# Altium PCB lw-skit.PcbDoc
Units mm, origin at the board's own origin, x right, y up, seen from the top; angles counter-clockwise.
Board outline 70.02 x 90.04 mm, 2 copper layers (Top Layer, Bottom Layer); 8 components, 21 nets, 94 pads, 19 vias.
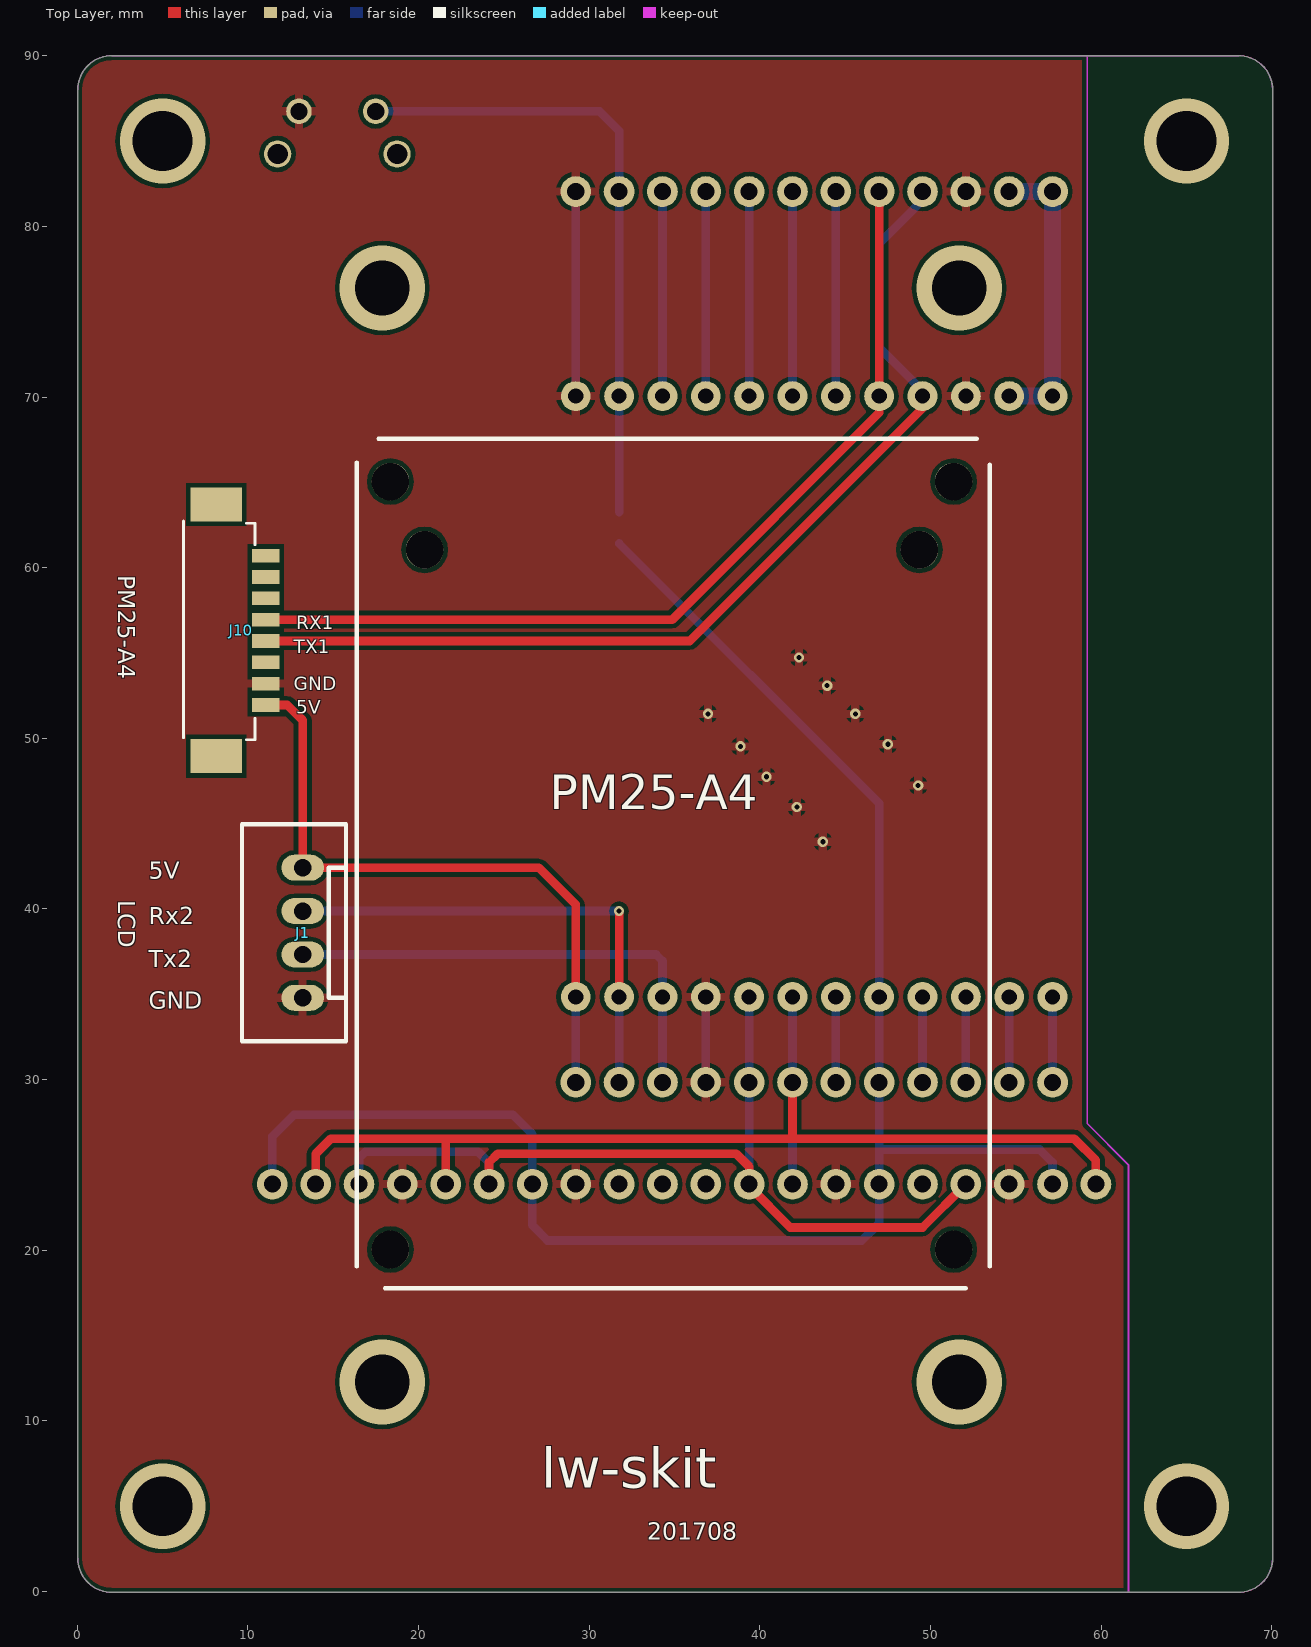
[diagram p0: Top Layer view]
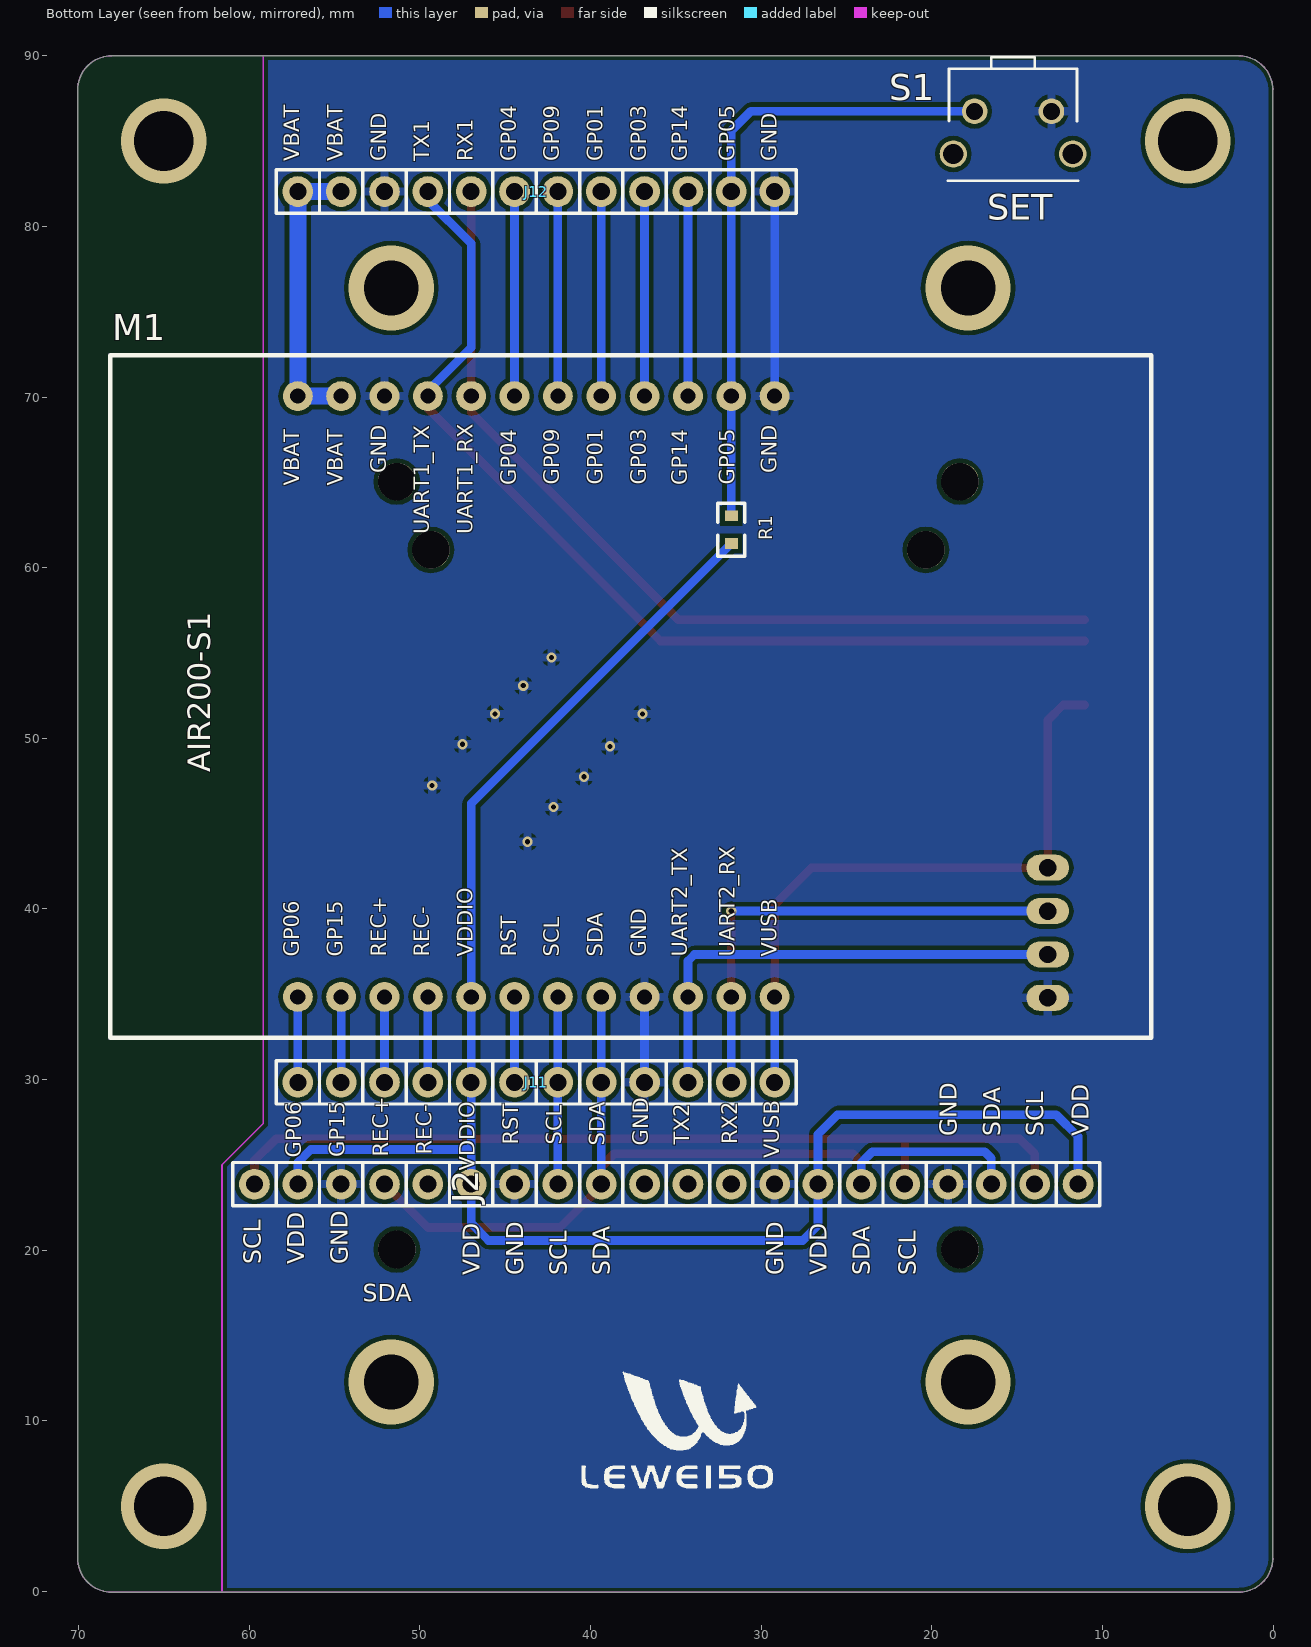
[diagram p1: Bottom Layer view, seen from below]

## Layer stack, top to bottom
Top Solder: solder mask 0.0102, Solder Resist, Dk 3.5
Top Layer: signal copper 0.0356
Dielectric 1: dielectric 0.32, FR-4, Dk 4.8
Bottom Layer: signal copper 0.0356
Bottom Solder: solder mask 0.0102, Solder Resist, Dk 3.5

## Board outline
0.027,1.961 0.027,88 cw(c2.027,88) 2.027,90 68.047,90 cw(c68.047,88) 70.047,88 70.047,1.961 cw(c68.047,1.961) 68.047,-0.039 2.027,-0.039 cw(c2.027,1.961)

## Design rules (kind name [scope] priority, off if disabled: settings)
Clearance 5VIN [InNet('+5V_IN')] p1: gap=0.508
Clearance RS485-B2 [InNet('RS485-B')] p2: gap=0.508
Clearance RS485-A2 [InNet('RS485-A')] p3: gap=0.508
Clearance VCC [InNet('+5V') vs InNet('GND')] p4: gap=0.508
Clearance Clear24V [InNet('POW') vs InNet('GND')] p5: gap=0.508
Clearance [All] p6: gap=0.254
HoleSize [All] p1: absolutevalues=TRUE maxlimit=5 minlimit=0.025 maxpercent=80.000 minpercent=20.000
MinimumSolderMaskSliver [All] p1: minsoldermaskwidth=0.2
PolygonConnect [All] p1: connectstyle=Relief reliefconductorwidth=0.508 reliefentries=4 polygonreliefangle="90 Angle" airgapwidth=0.254
RoutingVias [All] p1: holewidth=0.711 width=1.27 viastyle="Through Hole" minholewidth=0.711 minwidth=1.27 maxholewidth=0.711 maxwidth=1.27
SilkToSilkClearance [All] p1: silktosilkclearance=0.17
SilkToSolderMaskClearance [IsPad] p1: minsilkscreentomaskgap=0 clearancetoexposedcopper=TRUE
SolderMaskExpansion [All] p1: expansion=0.102
UnpouredPolygon [All] p1: allowunpoured=FALSE
Width Net1_1 [InNet('NetL1_1')] p1: maxlimit=3 minlimit=0.254 preferedwidth=0.508
Width 5V [InNet('5V')] p2: maxlimit=1.5 minlimit=0.5 preferedwidth=1
Width RXD [InNet('RXD')] p3: maxlimit=1.1 minlimit=0.254 preferedwidth=0.508
Width TXD [InNet('TXD')] p4: maxlimit=1.1 minlimit=0.254 preferedwidth=0.508
Width C-TXD [InNet('C-TXD')] p5: maxlimit=1.1 minlimit=0.254 preferedwidth=0.508
Width C-RXD [InNet('C-RXD')] p6: maxlimit=1.1 minlimit=0.254 preferedwidth=0.508
Width RS485-B [InNet('RS485-B')] p7: maxlimit=1.1 minlimit=0.5 preferedwidth=0.508
Width RS485-A [InNet('RS485-A')] p8: maxlimit=1.1 minlimit=0.5 preferedwidth=0.508
Width RS485-D [InNet('RS485-D')] p9: maxlimit=1.1 minlimit=0.5 preferedwidth=0.508
Width 3.3V [InNet('3.3V')] p10: maxlimit=2 minlimit=0.254 preferedwidth=0.5
Width RAW [InNet('RAW')] p11: maxlimit=3 minlimit=0.508 preferedwidth=1
Width 24V [InNet('24V')] p12: maxlimit=3 minlimit=1 preferedwidth=1
Width GND [InNet('GND')] p13: maxlimit=3 minlimit=0.254 preferedwidth=0.508
Width [All] p14: maxlimit=3 minlimit=0.254 preferedwidth=0.254
25 further rules are at their usual default settings.

## Components (designator, comment, footprint, x,y, rotation, side; value= is the part's Value field where it differs from the comment)
J1 "HMI" XH2.54_4P 13.208,38.608 r90 top
J2 "SIP20" DB-1X20 21.59,23.876 r0 bottom
J10 "PM2.5-A4" 1.27*8 11.049,60.706 r270 top
J11 "SIP12" DB-1X12 44.45,29.845 r180 bottom
J12 "SIP12" DB-1X12 44.45,82.042 r180 bottom
M1 "AIR200_S1" AIR200-S1 57.15,52.451 r90 bottom
R1 "10K" RES-SMD-0603 31.75,62.23 r270 bottom
S1 "SET" upkey 15.24,86.741 r180 bottom

## Footprints (in the part's own frame and the unit in brackets; to place one, negate y for a bottom-side part, rotate by r counter-clockwise, add the part's x,y. Pads: shape width x height; smd on the part's side, far side on the other; paste and mask are expansions set on the pad)
1.27*8 [mm]
  rect 0.8x1.6 smd: 1(8.75,0) 2(7.5,0) 3(6.25,0) 4(5,0) 5(3.75,0) 6(2.5,0) 7(1.25,0) 8(0,0)
  rect 2x3 smd: ""(-3,-2.9) ""(11.75,-2.9)
  silkscreen extent -2.03,-4.83 10.79,-0.63
AIR200-S1 [mil]
  round 69 hole 35: 1(-692.91,0) 2(-692.91,-100) 3(-692.91,-200) 4(-692.91,-300) 5(-692.91,-400) 6(-692.91,-500) 7(-692.91,-600) 8(-692.91,-700) 9(-692.91,-800) 10(-692.91,-900) 11(-692.91,-1000) 12(-692.91,-1100) 13(692.91,-1100) 14(692.91,-1000) 15(692.91,-900) 16(692.91,-800) 17(692.91,-700) 18(692.91,-600) 19(692.91,-500) 20(692.91,-400) 21(692.91,-300) 22(692.91,-200) 23(692.91,-100) 24(692.91,0)
  silkscreen extent -787,-1969 787,433
DB-1X12 [mm]
  round 1.8 hole 1: 1(-12.7,0) 2(-10.16,0) 3(-7.62,0) 4(-5.08,0) 5(-2.54,0) 6(0,0) 7(2.54,0) 8(5.08,0) 9(7.62,0) 10(10.16,0) 11(12.7,0) 12(15.24,0)
  silkscreen extent -13.97,-1.27 16.51,1.27, body extent -13.97,-1.27 16.51,1.27, height 2.5
DB-1X20 [mm]
  round 1.8 hole 1: 1(-10.16,0) 2(-7.62,0) 3(-5.08,0) 4(-2.54,0) 5(0,0) 6(2.54,0) 7(5.08,0) 8(7.62,0) 9(10.16,0) 10(12.7,0) 11(15.24,0) 12(17.78,0) 13(20.32,0) 14(22.86,0) 15(25.4,0) 16(27.94,0) 17(30.48,0) 18(33.02,0) 19(35.56,0) 20(38.1,0)
  silkscreen extent -11.43,-1.27 39.37,1.27, body extent -11.43,-1.27 39.37,1.27, height 2.5
RES-SMD-0603 [mil]
  rect 25x30 smd: 1(-32,0) 2(32,0)
  silkscreen extent -61,-31 61,31, body extent -50,-20 52,19, height 21
upkey [mm]
  round 1.5 hole 1: 1(-2.25,0) 2(2.25,0)
  round 1.6 hole 1.2: ""(-3.5,-2.5) ""(3.5,-2.5)
  silkscreen extent -3.81,-4.06 3.81,3.17
XH2.54_4P [mil]
  oval 60x98.43 hole 40: 1(-150,0) 2(-50,0) 3(50,0) 4(150,0)
  silkscreen extent -250,-100 250,140

## Part data
J1: library part XH2.54-4P, "XH2.54-4P"
J10: library part FPC-1.27-8P, "FPC-1.27-8P"
R1: library part Res0603, "Res0603"
S1: library part SW_KEY_L, "按键开关立式"

## Free pads (board coordinates)
  round 2.2 hole 2.2: 0(18.349,20.047) 0(18.349,65.047) 0(20.349,61.047) 0(49.349,61.047) 0(51.349,20.047) 0(51.349,65.047)

## Via types
v1: diameter 0.6, hole 0.3, Top Layer to Bottom Layer, 11 vias
v2: diameter 5, hole 3.5, Top Layer to Bottom Layer, 4 vias
v3: diameter 5, hole 3.2, Top Layer to Bottom Layer, 4 vias

## Nets (pads, with @x,y where several pads share a name; then routed paths per layer and width w, separated by ;. In a path a pad name is that pad's centre, name@x,y a point inside that pad or via, vN(x,y) a via of type N, cw(c..) or ccw(c..) an arc to the next point about the centre after c; other vN are vias at no path point)
GND: J1.1 J2.4 J2.8 J2.14 J2.18 J10.2 J11.9 J12.3 J12.12 M1.9 M1.13 M1.22 S1.2 | length 17
  Bottom Layer w0.508: M1.13 J12.12 ; J11.9 M1.9
  other v1: 43.688,43.942 42.164,45.974 49.276,47.244 40.386,47.752 38.862,49.53 47.498,49.657 36.957,51.435 45.593,51.435 43.942,53.086 42.291,54.737
GP01: J12.8 M1.17 | length 12
  Bottom Layer w0.508: M1.17 J12.8
GP03: J12.9 M1.16 | length 12
  Bottom Layer w0.508: M1.16 J12.9
GP04: J12.6 M1.19 | length 12
  Bottom Layer w0.508: M1.19 J12.6
GP05: J12.11 M1.14 R1.1 S1.1 | length 37.1
  Bottom Layer w0.508: S1.1 30.607,86.741 31.75,85.598 J12.11 M1.14 R1.1@31.75,63.246
GP06: J11.1 M1.1 | length 5
  Bottom Layer w0.508: J11.1 M1.1
GP09: J12.7 M1.18 | length 12
  Bottom Layer w0.508: M1.18 J12.7
GP14: J12.10 M1.15 | length 12
  Bottom Layer w0.508: M1.15 J12.10
GP15: J11.2 M1.2 | length 5
  Bottom Layer w0.508: J11.2 M1.2
REC+: J11.3 M1.3 | length 5
  Bottom Layer w0.508: J11.3 M1.3
REC-: J11.4 M1.4 | length 5
  Bottom Layer w0.508: J11.4 M1.4
RESET: J11.6 M1.6 | length 5
  Bottom Layer w0.508: J11.6 M1.6
SCL: J2.2 J2.5 J2.13 J2.20 J11.7 M1.7 | length 67.1
  Top Layer w0.508: J2.2@13.97,23.749 13.97,25.654 14.859,26.543 21.59,26.543 ; J2.5@21.59,23.749 21.59,26.543 ; J11.7 41.91,26.543 ; J2.20 59.69,25.273 58.42,26.543 41.91,26.543 ; 21.59,26.543 41.91,26.543
  Bottom Layer w0.508: J2.13@41.91,23.749 J11.7 M1.7
SDA: J2.3 J2.6 J2.12 J2.17 J11.8 M1.8 | length 55.2
  Top Layer w0.508: J2.6@24.13,23.749 24.13,25.146 24.638,25.654 38.608,25.654 39.37,24.892 39.37,23.749 41.783,21.336 49.53,21.336 J2.17
  Bottom Layer w0.508: J2.3@16.51,23.749 16.51,25.4 16.891,25.781 23.495,25.781 24.13,25.146 J2.6@24.13,23.749 ; J2.12@39.37,23.749 J11.8 M1.8
UART1_RXD: J10.5 J12.5 M1.20 | length 53.9
  Top Layer w0.508: J10.5 34.858,56.956 46.99,69.088 M1.20 J12.5
UART1_TXD: J10.4 J12.4 M1.21 | length 58.5
  Top Layer w0.508: J10.4 35.894,55.706 49.53,69.342 M1.21
  Bottom Layer w0.508: M1.21@49.53,70.612 49.276,70.612 46.99,72.898 46.99,78.994 49.53,81.534 J12.4
UART2_RXD: J1.3 J11.11 M1.11 | length 28.6
  Top Layer w0.508: M1.11 v1(31.75,39.878)
  Bottom Layer w0.508: J1.3 v1(31.75,39.878) ; J11.11 M1.11
UART2_TXD: J1.2 J11.10 M1.10 | length 28.4
  Bottom Layer w0.508: J1.2 33.909,37.338 34.29,36.957 M1.10 J11.10
VBAT: J12.1 J12.2 M1.23 M1.24 | length 17.1
  Bottom Layer w1: M1.23 M1.24 J12.1 J12.2
VDDIO: J2.1 J2.7 J2.15 J2.19 J11.5 M1.5 R1.2 | length 103.5
  Bottom Layer w0.508: J2.1@11.43,23.749 11.43,26.67 12.7,27.94 25.527,27.94 26.67,26.797 26.67,21.463 27.559,20.574 45.974,20.574 46.99,21.59 46.99,25.908 ; R1.2 46.99,46.177 M1.5 J11.5 46.99,25.908 ; J2.19 57.15,25.146 56.388,25.908 46.99,25.908
VUSB: J1.4 J10.1 J11.12 M1.12 | length 37.7
  Top Layer w0.508: J10.1 12.306,51.956 13.208,51.054 J1.4 ; J1.4@13.97,42.418 27.051,42.418 29.21,40.259 M1.12
  Bottom Layer w0.508: J11.12 M1.12
pads on no net: J2.9 J2.10 J2.11 J2.16 J10. J10.3 J10.6 J10.7 J10.8 S1.
copper on no net:
  other v2: 5,5 65,5 5,85 65,85
  other v3: 17.874,12.286 51.674,12.286 17.874,76.386 51.674,76.386

## Polygon pours and split planes (outlines as drawn)
GND on Bottom Layer "Bottom Layer-No Net" (solid, remove dead copper, pour order 4): 77.724,93.726 77.597,93.599 -6.604,93.599 -6.604,-12.446 -5.207,-13.843 0.889,-7.747 97.409,-7.747
GND on Top Layer "Bottom Layer-No Net" (solid, remove dead copper, pour order 6): 74.422,94.488 -12.065,94.488 -12.954,93.599 -9.652,90.297 -9.652,-11.557 78.613,-11.557 79.756,-10.414

## Keep-outs
Keep-Out Layer:
  lines w0.013: 0.027,52.186 0.027,52.952 ; 0.027,1.961 ccw(c2.027,1.961) 2.027,-0.039 68.047,-0.039 ccw(c68.047,1.961) 70.047,1.961 70.047,88 ccw(c68.047,88) 68.047,90 2.027,90 ccw(c2.027,88) 0.027,88 0.027,1.961
  lines w0.1: 59.182,90 59.182,27.432 61.595,25.019 61.595,0

## Silkscreen, mask and mechanical layers (free items; w line width, h text height)
Top Overlay:
  lines w0.254: 16.383,19.05 16.383,66.167 ; 17.653,67.564 52.705,67.564 ; 18.034,17.78 52.07,17.78 ; 53.467,19.05 53.467,66.04
  text "PM25-A4" at 2.413,59.563 h1 r270
  text "RX1" at 12.827,56.388 h0.8
  text "TX1" at 12.7,54.991 h0.8
  text "GND" at 12.7,52.832 h0.8
  text "5V" at 12.827,51.435 h0.8
  text "PM25-A4" at 27.686,45.847 h2
  text "5V" at 4.191,41.783 h1
  text "LCD" at 2.413,40.513 h1 r270
  text "Rx2" at 4.191,39.116 h1
  text "Tx2" at 4.191,36.576 h1
  text "GND" at 4.191,34.163 h1
  text "lw-skit" at 27.178,5.334 h4
  text "201708" at 33.401,3.048 h1
Bottom Overlay:
  drawing of 982 lines, arcs and shapes, not listed
  text "GND" at 28.778,83.812 h1.52 r270
  text "GP05" at 31.242,83.812 h1.52 r270
  text "GP14" at 34.036,83.812 h1.52 r270
  text "GP03" at 36.449,83.812 h1.52 r270
  text "GP01" at 38.989,83.812 h1.52 r270
  text "GP09" at 41.529,83.812 h1.52 r270
  text "GP04" at 44.069,83.812 h1.52 r270
  text "RX1" at 46.609,83.812 h1.52 r270
  text "TX1" at 49.149,83.812 h1.52 r270
  text "GND" at 51.689,83.812 h1.52 r270
  text "VBAT" at 54.229,83.812 h1.52 r270
  text "VBAT" at 56.769,83.812 h1.52 r270
  text "SET" at 16.764,80.391 h1.5
  text "VDD" at 10.795,26.67 h1 r270
  text "SCL" at 13.462,26.67 h1 r270
  text "SDA" at 16.002,26.67 h1 r270
  text "GND" at 18.542,26.67 h1 r270
  text "RX2" at 31.115,26.21 h1.52 r270
  text "TX2" at 33.909,26.179 h1.52 r270
  text "SCL" at 41.402,26.2 h1.52 r270
  text "RST" at 43.942,26.19 h1.52 r270
  text "GND" at 36.322,26.121 h1.52 r270
  text "SDA" at 38.862,26.123 h1.52 r270
  text "REC-" at 49.022,25.585 h1.52 r270
  text "REC+" at 51.562,25.474 h1.52 r270
  text "GP15" at 54.102,25.449 h1.52 r270
  text "GP06" at 56.642,25.422 h1.52 r270
  text "VUSB" at 28.651,25.392 h1.52 r270
  text "VDDIO" at 46.482,24.651 h1.52 r270
  text "GND" at 54.229,19.177 h1 r270
  text "VDD" at 56.769,19.177 h1 r270
  text "SCL" at 59.309,19.177 h1 r270
  text "SCL" at 20.955,18.542 h1 r270
  text "SDA" at 23.622,18.542 h1 r270
  text "VDD" at 26.162,18.542 h1 r270
  text "GND" at 28.702,18.542 h1 r270
  text "SDA" at 38.862,18.542 h1 r270
  text "SCL" at 41.402,18.542 h1 r270
  text "GND" at 43.942,18.542 h1 r270
  text "VDD" at 46.482,18.542 h1 r270
  text "SDA" at 53.34,17.018 h1
Mechanical 1:
  text "WIFT" at -5.192,-79.462 h0.06

## Text inside footprints (layer, text, board x,y; h text height)
M1: Bottom Overlay "GND" at 28.778,65.54 h1.52 r270; Bottom Overlay "VBAT" at 56.769,64.812 h1.52 r270; Bottom Overlay "VBAT" at 54.229,64.812 h1.52 r270; Bottom Overlay "GND" at 51.689,65.54 h1.52 r270; Bottom Overlay "UART1_TX" at 49.149,61.963 h1.52 r270; Bottom Overlay "UART1_RX" at 46.609,61.963 h1.52 r270; Bottom Overlay "GP04" at 44.069,64.818 h1.52 r270; Bottom Overlay "GP09" at 41.529,64.857 h1.52 r270; Bottom Overlay "GP01" at 38.989,64.857 h1.52 r270; Bottom Overlay "GP03" at 36.449,64.859 h1.52 r270; Bottom Overlay "GP14" at 34.036,64.818 h1.52 r270; Bottom Overlay "AIR200-S1" at 61.849,48.006 h2.29 r270; Bottom Overlay "GP05" at 31.242,64.867 h1.52 r270; Bottom Overlay "UART2_RX" at 31.242,37.198 h1.52 r270; Bottom Overlay "UART2_TX" at 34.036,37.198 h1.52 r270; Bottom Overlay "GND" at 36.449,37.198 h1.52 r270; Bottom Overlay "SDA" at 38.989,37.198 h1.52 r270; Bottom Overlay "SCL" at 41.529,37.198 h1.52 r270; Bottom Overlay "RST" at 44.069,37.198 h1.52 r270; Bottom Overlay "VDDIO" at 46.609,37.198 h1.52 r270; Bottom Overlay "REC-" at 49.149,37.198 h1.52 r270; Bottom Overlay "REC+" at 51.689,37.198 h1.52 r270; Bottom Overlay "GP15" at 54.229,37.198 h1.52 r270; Bottom Overlay "GP06" at 56.769,37.198 h1.52 r270; Bottom Overlay "VUSB" at 28.778,37.198 h1.52 r270